# EAGLE board sensorboard final (EAGLE 9.3.0)
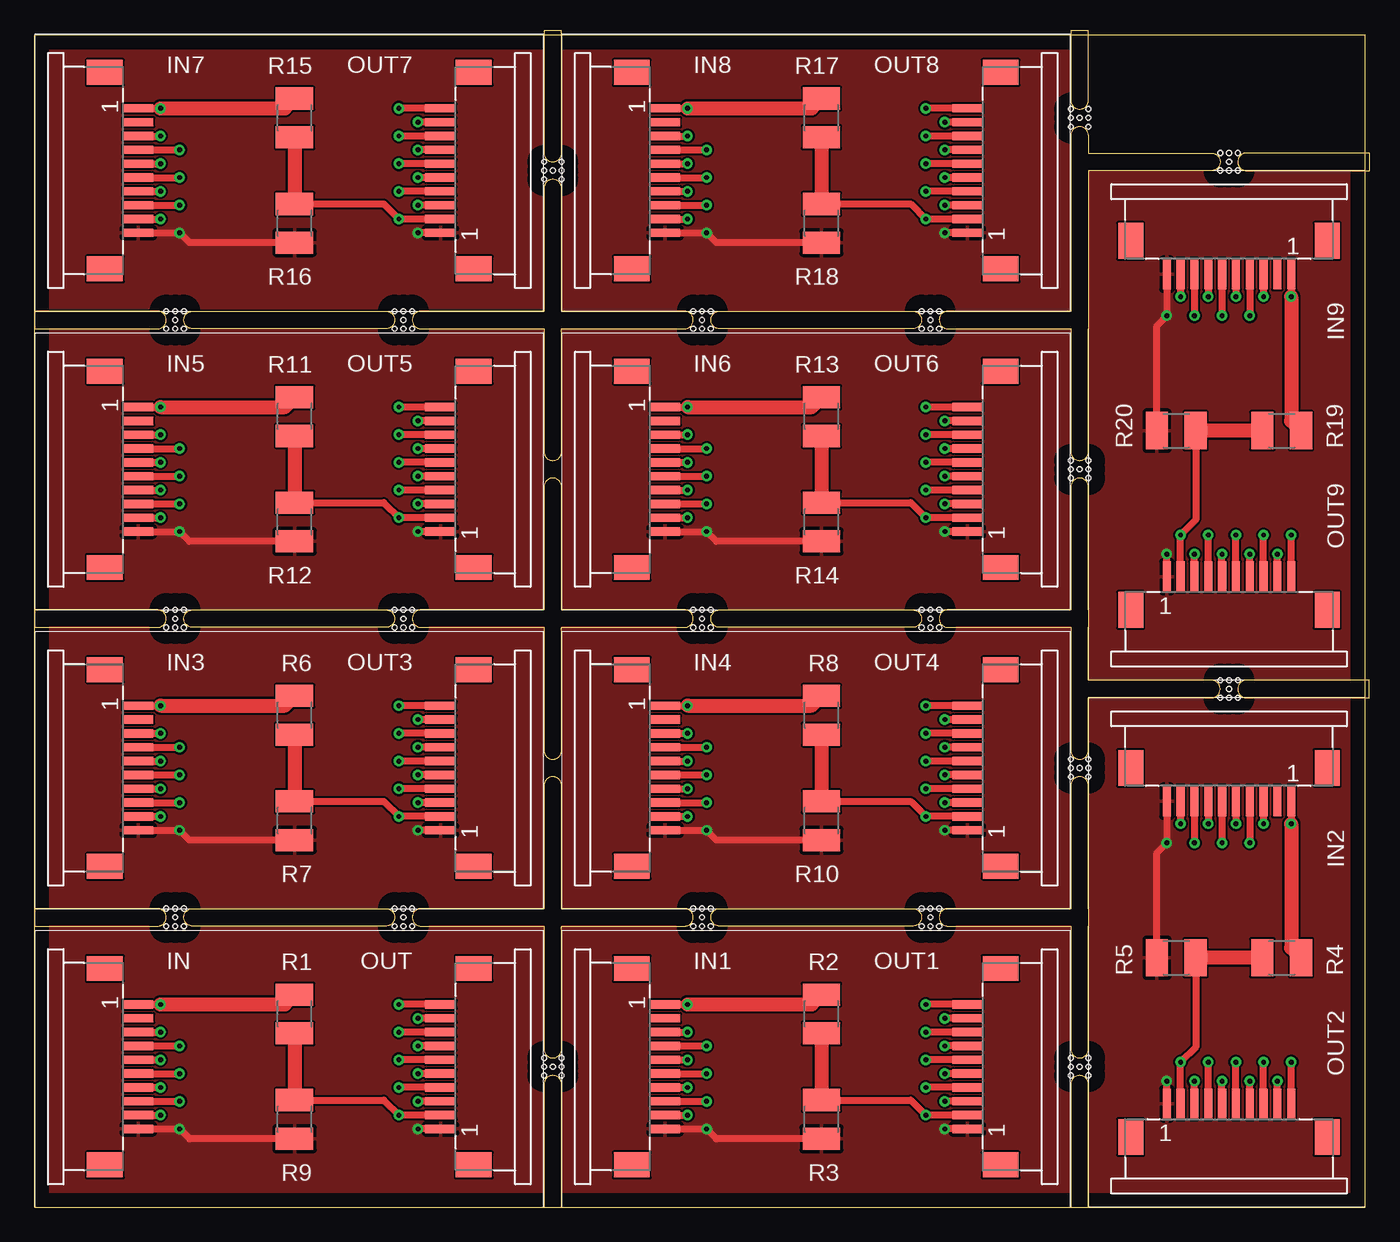
[diagram p0: board, top side]
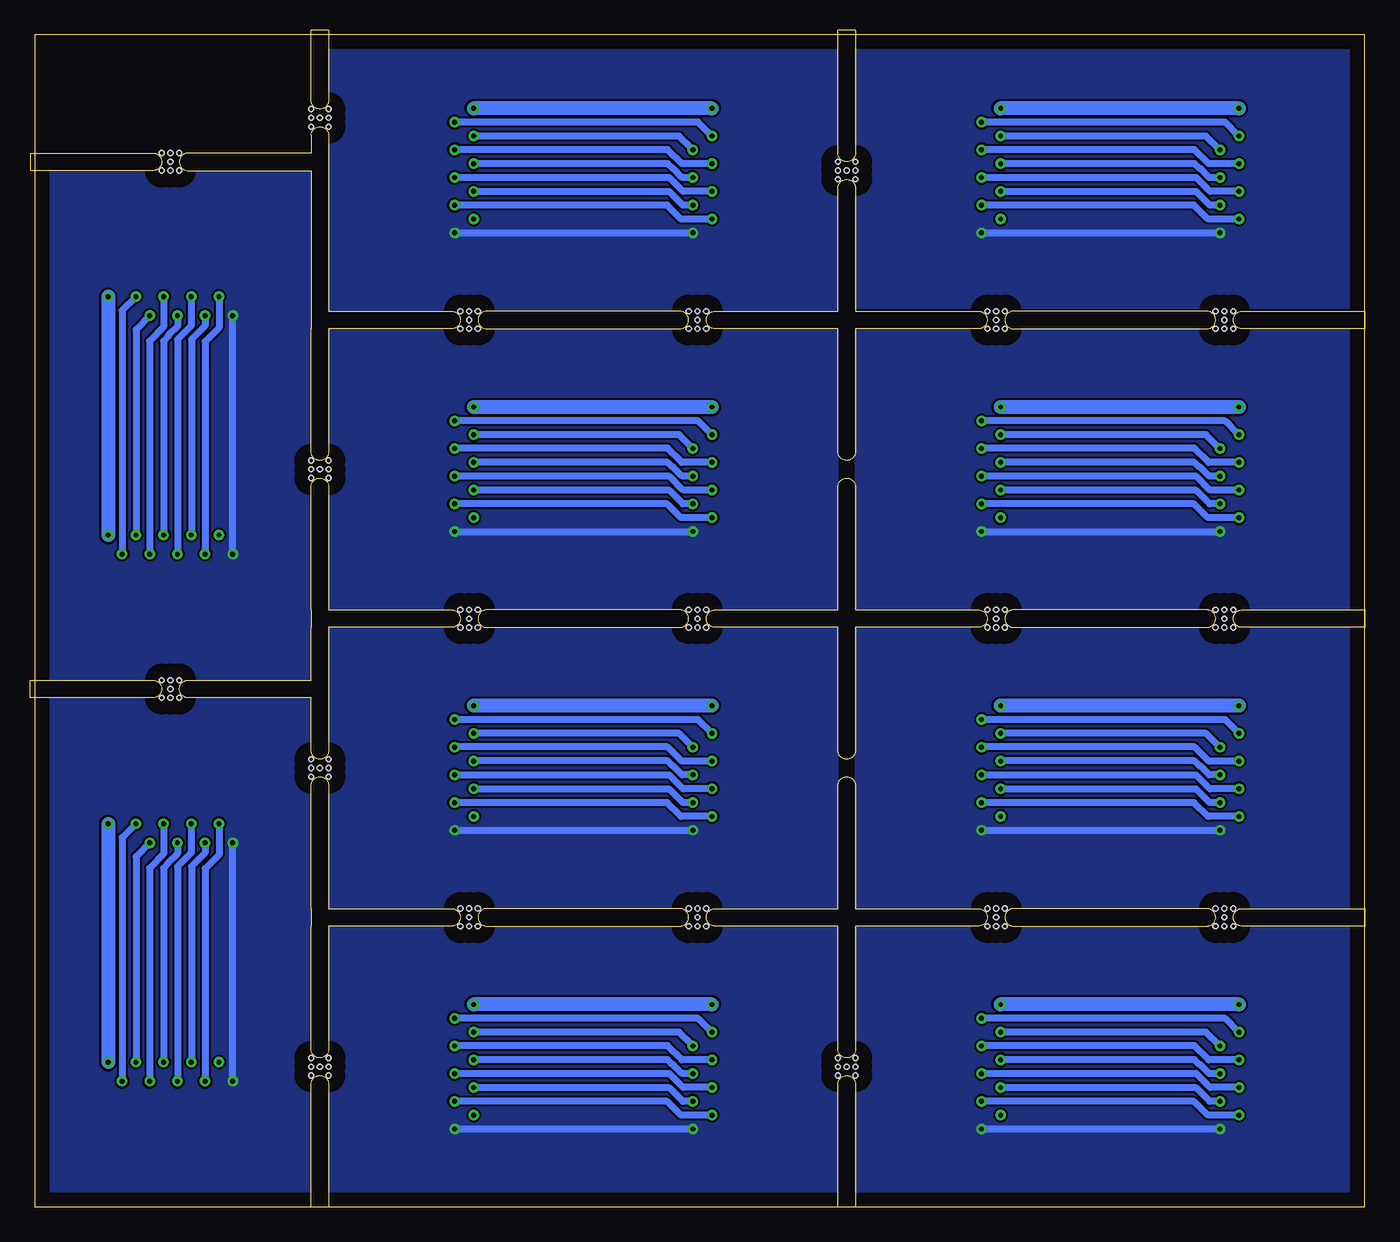
[diagram p1: board, bottom side, seen from below]

Size 96.19 x 84.76 mm. Coordinates in mm from the lower left corner, seen from the top.
Outline: 96.19,84.76 96.19,0 0,0 0,84.76 96.19,84.76
Copper layers (1*16): Top 0.035mm / dielectric 1.5mm / Bottom 0.035mm
Design rules "default": minimum track width 6mil, minimum drill 0.35mm, track to track 6mil, track to pad 6mil, pad to pad 6mil, via to via 6mil, smd to smd 6mil, copper to edge 40mil, drill to drill 6mil, minimum pad ring 10mil, minimum via ring 8mil, stop-mask expansion 4mil, vias tented up to drill 0mil, thermal gap 10mil
Holes 0.35 mm at 10.16,64.77 9.53,64.77 10.79,64.77 10.16,64.14 9.53,63.5 10.16,63.5 10.79,63.5 26.67,64.77 26.04,64.77 27.3,64.77 26.67,64.14 26.04,63.5 26.67,63.5 27.3,63.5 48.26,64.77 47.62,64.77 48.89,64.77 48.26,64.14 47.62,63.5 48.26,63.5 48.89,63.5 64.14,64.77 64.77,64.77 65.41,64.77 64.77,64.14 64.14,63.5 64.77,63.5 65.41,63.5 36.83,75.56 36.83,74.93 36.83,74.3 37.46,74.93 38.1,75.56 38.1,74.93 38.1,74.3 26.04,43.18 26.67,43.18 27.3,43.18 26.67,42.54 26.04,41.91 26.67,41.91 27.3,41.91 9.53,43.18 10.16,43.18 10.79,43.18 10.16,42.54 9.53,41.91 10.16,41.91 10.79,41.91 9.53,21.59 10.16,21.59 10.79,21.59 10.16,20.96 9.53,20.32 10.16,20.32 10.79,20.32 26.04,21.59 26.67,21.59 27.3,21.59 26.67,20.96 26.04,20.32 26.67,20.32 27.3,20.32 36.83,9.53 36.83,10.16 36.83,10.79 37.46,10.16 38.1,9.53 38.1,10.16 38.1,10.79 47.62,21.59 48.26,21.59 48.89,21.59 48.26,20.96 47.62,20.32 48.26,20.32 48.89,20.32 64.14,21.59 64.77,21.59 65.41,21.59 64.77,20.96 64.14,20.32 64.77,20.32 65.41,20.32 74.93,9.53 74.93,10.16 74.93,10.79 75.56,10.16 76.2,9.53 76.2,10.16 76.2,10.79 47.62,43.18 48.26,43.18 48.89,43.18 48.26,42.54 47.62,41.91 48.26,41.91 48.89,41.91 64.14,43.18 64.77,43.18 65.41,43.18 64.77,42.54 64.14,41.91 64.77,41.91 65.41,41.91 74.93,31.11 74.93,31.75 74.93,32.38 75.56,31.75 76.2,31.11 76.2,31.75 76.2,32.38 85.73,38.1 86.36,38.1 87,38.1 86.36,37.46 85.73,36.83 86.36,36.83 87,36.83 74.93,52.7 74.93,53.34 74.93,53.97 75.56,53.34 76.2,52.7 76.2,53.34 76.2,53.97 74.93,78.11 74.93,78.74 74.93,79.38 75.56,78.74 76.2,78.11 76.2,78.74 76.2,79.38 85.73,76.2 86.36,76.2 87,76.2 86.36,75.56 85.73,74.93 86.36,74.93 87,74.93
Milling: 134 lines

## Footprints (pad centres in the part's own frame; a part is rotated, then mirrored left to right if it is on the bottom)
68611014422 = smd 0.6 x 2.2: 1 -4.5,2.4; 2 -3.5,2.4; 3 -2.5,2.4; 4 -1.5,2.4; 5 -0.5,2.4; 6 0.5,2.4; 7 1.5,2.4; 8 2.5,2.4; 9 3.5,2.4; 10 4.5,2.4 | smd 1.8 x 2.6: Z1 -7.1,0; Z2 7.1,0
R1210 = smd 1.6 x 2.7: 1 -1.4,0; 2 1.4,0

## Placement (x,y rotation side)
IN  analog  [68611014422]  5.08,10.16 270 top
IN1  analog  [68611014422]  43.18,10.16 270 top
IN2  analog  [68611014422]  86.36,31.75 180 top
IN3  analog  [68611014422]  5.08,31.75 270 top
IN4  analog  [68611014422]  43.18,31.75 270 top
IN5  analog  [68611014422]  5.08,53.34 270 top
IN6  analog  [68611014422]  43.18,53.34 270 top
IN7  analog  [68611014422]  5.08,74.93 270 top
IN8  analog  [68611014422]  43.18,74.93 270 top
IN9  analog  [68611014422]  86.36,69.85 180 top
OUT  analog  [68611014422]  31.75,10.16 90 top
OUT1  analog  [68611014422]  69.85,10.16 90 top
OUT2  analog  [68611014422]  86.36,5.08 0 top
OUT3  analog  [68611014422]  31.75,31.75 90 top
OUT4  analog  [68611014422]  69.85,31.75 90 top
OUT5  analog  [68611014422]  31.75,53.34 90 top
OUT6  analog  [68611014422]  69.85,53.34 90 top
OUT7  analog  [68611014422]  31.75,74.93 90 top
OUT8  analog  [68611014422]  69.85,74.93 90 top
OUT9  analog  [68611014422]  86.36,43.18 0 top
R1  NTC  [R1210]  18.8,13.97 90 top
R2  NTC  [R1210]  56.9,13.97 90 top
R3  10K  [R1210]  56.9,6.35 90 top
R4  NTC  [R1210]  90.17,18.03 0 top
R5  10K  [R1210]  82.55,18.03 0 top
R6  NTC  [R1210]  18.8,35.56 90 top
R7  10K  [R1210]  18.8,27.94 90 top
R8  NTC  [R1210]  56.9,35.56 90 top
R9  10K  [R1210]  18.8,6.35 90 top
R10  10K  [R1210]  56.9,27.94 90 top
R11  NTC  [R1210]  18.8,57.15 90 top
R12  10K  [R1210]  18.8,49.53 90 top
R13  NTC  [R1210]  56.9,57.15 90 top
R14  10K  [R1210]  56.9,49.53 90 top
R15  NTC  [R1210]  18.8,78.74 90 top
R16  10K  [R1210]  18.8,71.12 90 top
R17  NTC  [R1210]  56.9,78.74 90 top
R18  10K  [R1210]  56.9,71.12 90 top
R19  NTC  [R1210]  90.17,56.13 0 top
R20  10K  [R1210]  82.55,56.13 0 top

## Library data of the parts
IN IN1-IN9 OUT OUT1-OUT9 = Wurth_Elektronik_Electromechanic_FPC_Connectors_&_Flat_Flexible_Cable_rev18c
R1-R20 = rcl; SPICEPREFIX: R

## Nets
+5V: IN.1 OUT.10 R1.2
+5V1: IN1.1 OUT1.10 R2.2
+5V2: IN2.1 OUT2.10 R4.2
+5V3: IN3.1 OUT3.10 R6.2
+5V4: IN4.1 OUT4.10 R8.2
+5V5: IN5.1 OUT5.10 R11.2
+5V6: IN6.1 OUT6.10 R13.2
+5V7: IN7.1 OUT7.10 R15.2
+5V8: IN8.1 OUT8.10 R17.2
+5V9: IN9.1 OUT9.10 R19.2
AD1: IN1.3 OUT1.9
AD2: IN.3 OUT.9
AD3: IN.4 OUT.8
AD4: IN.5 OUT.7
AD5: IN.6 OUT.6
AD6: IN.7 OUT.5
AD7: IN.8 OUT.4
AD8: IN.9 OUT.3
AD9: IN1.4 OUT1.8
AD10: IN1.5 OUT1.7
AD11: IN1.9 OUT1.3
AD12: IN1.8 OUT1.4
AD13: IN1.7 OUT1.5
AD14: IN1.6 OUT1.6
AD15: IN2.3 OUT2.9
AD16: IN2.4 OUT2.8
AD17: IN2.5 OUT2.7
AD18: IN2.9 OUT2.3
AD19: IN2.8 OUT2.4
AD20: IN2.7 OUT2.5
AD21: IN2.6 OUT2.6
AD22: IN3.3 OUT3.9
AD23: IN3.4 OUT3.8
AD24: IN3.5 OUT3.7
AD25: IN3.9 OUT3.3
AD26: IN3.8 OUT3.4
AD27: IN3.7 OUT3.5
AD28: IN3.6 OUT3.6
AD29: IN4.3 OUT4.9
AD30: IN4.4 OUT4.8
AD31: IN4.5 OUT4.7
AD32: IN4.9 OUT4.3
AD33: IN4.8 OUT4.4
AD34: IN4.7 OUT4.5
AD35: IN4.6 OUT4.6
AD36: IN5.3 OUT5.9
AD37: IN5.4 OUT5.8
AD38: IN5.5 OUT5.7
AD39: IN5.9 OUT5.3
AD40: IN5.8 OUT5.4
AD41: IN5.7 OUT5.5
AD42: IN5.6 OUT5.6
AD43: IN6.3 OUT6.9
AD44: IN6.4 OUT6.8
AD45: IN6.5 OUT6.7
AD46: IN6.9 OUT6.3
AD47: IN6.8 OUT6.4
AD48: IN6.7 OUT6.5
AD49: IN6.6 OUT6.6
AD50: IN7.3 OUT7.9
AD51: IN7.4 OUT7.8
AD52: IN7.5 OUT7.7
AD53: IN7.9 OUT7.3
AD54: IN7.8 OUT7.4
AD55: IN7.7 OUT7.5
AD56: IN7.6 OUT7.6
AD57: IN8.3 OUT8.9
AD58: IN8.4 OUT8.8
AD59: IN8.5 OUT8.7
AD60: IN8.9 OUT8.3
AD61: IN8.8 OUT8.4
AD62: IN8.7 OUT8.5
AD63: IN8.6 OUT8.6
AD64: IN9.3 OUT9.9
AD65: IN9.4 OUT9.8
AD66: IN9.5 OUT9.7
AD67: IN9.9 OUT9.3
AD68: IN9.8 OUT9.4
AD69: IN9.7 OUT9.5
AD70: IN9.6 OUT9.6
ADB: OUT.2 R1.1 R9.2
ADB1: OUT1.2 R2.1 R3.2
ADB2: OUT2.2 R4.1 R5.2
ADB3: OUT3.2 R6.1 R7.2
ADB4: OUT4.2 R8.1 R10.2
ADB5: OUT5.2 R11.1 R12.2
ADB6: OUT6.2 R13.1 R14.2
ADB7: OUT7.2 R15.1 R16.2
ADB8: OUT8.2 R17.1 R18.2
ADB9: OUT9.2 R19.1 R20.2
AGND: IN.10 OUT.1 R9.1
AGND1: IN1.10 OUT1.1 R3.1
AGND2: IN2.10 OUT2.1 R5.1
AGND3: IN3.10 OUT3.1 R7.1
AGND4: IN4.10 OUT4.1 R10.1
AGND5: IN5.10 OUT5.1 R12.1
AGND6: IN6.10 OUT6.1 R14.1
AGND7: IN7.10 OUT7.1 R16.1
AGND8: IN8.10 OUT8.1 R18.1
AGND9: IN9.10 OUT9.1 R20.1

## Tracks (layer width: path | path; a pad name or v marks a point on that pad's centre or on a via)
+5V  (via drill 0.35)
  Top 0.508: IN.1 v9.11,14.66 | OUT.10 v26.34,14.66
  Top 1.016: v9.11,14.66 18.09,14.66 R1.2
  Bottom 1.016: v9.11,14.66 v26.34,14.66
+5V1  (via drill 0.35)
  Top 0.508: IN1.1 v47.21,14.66 | OUT1.10 v64.44,14.66
  Top 1.016: v47.21,14.66 56.19,14.66 R2.2
  Bottom 1.016: v47.21,14.66 v64.44,14.66
+5V2  (via drill 0.35)
  Top 0.508: IN2.1 v90.86,27.72 | OUT2.10 v90.86,10.49
  Top 1.016: v90.86,27.72 90.86,18.74 R4.2
  Bottom 1.016: v90.86,27.72 v90.86,10.49
+5V3  (via drill 0.35)
  Top 0.508: IN3.1 v9.11,36.25 | OUT3.10 v26.34,36.25
  Top 1.016: v9.11,36.25 18.09,36.25 R6.2
  Bottom 1.016: v9.11,36.25 v26.34,36.25
+5V4  (via drill 0.35)
  Top 0.508: IN4.1 v47.21,36.25 | OUT4.10 v64.44,36.25
  Top 1.016: v47.21,36.25 56.19,36.25 R8.2
  Bottom 1.016: v47.21,36.25 v64.44,36.25
+5V5  (via drill 0.35)
  Top 0.508: IN5.1 v9.11,57.84 | OUT5.10 v26.34,57.84
  Top 1.016: v9.11,57.84 18.09,57.84 R11.2
  Bottom 1.016: v9.11,57.84 v26.34,57.84
+5V6  (via drill 0.35)
  Top 0.508: IN6.1 v47.21,57.84 | OUT6.10 v64.44,57.84
  Top 1.016: v47.21,57.84 56.19,57.84 R13.2
  Bottom 1.016: v47.21,57.84 v64.44,57.84
+5V7  (via drill 0.35)
  Top 0.508: IN7.1 v9.11,79.43 | OUT7.10 v26.34,79.43
  Top 1.016: v9.11,79.43 18.09,79.43 R15.2
  Bottom 1.016: v9.11,79.43 v26.34,79.43
+5V8  (via drill 0.35)
  Top 0.508: IN8.1 v47.21,79.43 | OUT8.10 v64.44,79.43
  Top 1.016: v47.21,79.43 56.19,79.43 R17.2
  Bottom 1.016: v47.21,79.43 v64.44,79.43
+5V9  (via drill 0.35)
  Top 0.508: IN9.1 v90.86,65.82 | OUT9.10 v90.86,48.59
  Top 1.016: v90.86,65.82 90.86,56.84 R19.2
  Bottom 1.016: v90.86,65.82 v90.86,48.59
AD1  (via drill 0.35)
  Top 0.508: IN1.3 v47.21,12.66 | OUT1.9 v65.82,13.66
  Bottom 0.508: v47.21,12.66 48.21,13.66 v65.82,13.66
AD2  (via drill 0.35)
  Top 0.508: IN.3 v9.11,12.66 | OUT.9 v27.72,13.66
  Bottom 0.508: v9.11,12.66 10.11,13.66 v27.72,13.66
AD3  (via drill 0.35)
  Top 0.508: IN.4 v10.49,11.66 | OUT.8 v26.34,12.66
  Bottom 0.508: v10.49,11.66 11.49,12.66 v26.34,12.66
AD4  (via drill 0.35)
  Top 0.508: IN.5 v9.11,10.66 | OUT.7 v27.72,11.66
  Bottom 0.508: v9.11,10.66 11.29,10.66 12.32,11.68 27.7,11.68 v27.72,11.66
AD5  (via drill 0.35)
  Top 0.508: IN.6 v10.49,9.66 | OUT.6 v26.34,10.66
  Bottom 0.508: v10.49,9.66 11.27,9.66 11.92,10.31 11.96,10.31 12.32,10.67 v26.33,10.67 v26.34,10.66
AD6  (via drill 0.35)
  Top 0.508: IN.7 v9.11,8.66 | OUT.5 v27.72,9.66
  Bottom 0.508: v9.11,8.66 11.2,8.66 12.19,9.65 v27.71,9.65 v27.72,9.66
AD7  (via drill 0.35)
  Top 0.508: IN.8 v10.49,7.66 | OUT.4 v26.34,8.66
  Bottom 0.508: v10.49,7.66 11.22,7.66 12.19,8.64 26.32,8.64 v26.34,8.66
AD8  (via drill 0.35)
  Top 0.508: IN.9 v9.11,6.66 | OUT.3 v27.72,7.66
  Bottom 0.508: v9.11,6.66 11.36,6.66 12.36,7.66 v27.72,7.66
AD9  (via drill 0.35)
  Top 0.508: IN1.4 v48.59,11.66 | OUT1.8 v64.44,12.66
  Bottom 0.508: v48.59,11.66 49.59,12.66 v64.44,12.66
AD10  (via drill 0.35)
  Top 0.508: IN1.5 v47.21,10.66 | OUT1.7 v65.82,11.66
  Bottom 0.508: v47.21,10.66 49.39,10.66 50.42,11.68 65.8,11.68 v65.82,11.66
AD11  (via drill 0.35)
  Top 0.508: IN1.9 v47.21,6.66 | OUT1.3 v65.82,7.66
  Bottom 0.508: v47.21,6.66 49.46,6.66 50.46,7.66 v65.82,7.66
AD12  (via drill 0.35)
  Top 0.508: IN1.8 v48.59,7.66 | OUT1.4 v64.44,8.66
  Bottom 0.508: v48.59,7.66 49.32,7.66 50.29,8.64 64.42,8.64 v64.44,8.66
AD13  (via drill 0.35)
  Top 0.508: IN1.7 v47.21,8.66 | OUT1.5 v65.82,9.66
  Bottom 0.508: v47.21,8.66 49.3,8.66 50.29,9.65 v65.81,9.65 v65.82,9.66
AD14  (via drill 0.35)
  Top 0.508: IN1.6 v48.59,9.66 | OUT1.6 v64.44,10.66
  Bottom 0.508: v48.59,9.66 49.37,9.66 50.02,10.31 50.06,10.31 50.42,10.67 v64.43,10.67 v64.44,10.66
AD15  (via drill 0.35)
  Top 0.508: IN2.3 v88.86,27.72 | OUT2.9 v89.86,9.11
  Bottom 0.508: v88.86,27.72 89.86,26.72 v89.86,9.11
AD16  (via drill 0.35)
  Top 0.508: IN2.4 v87.86,26.34 | OUT2.8 v88.86,10.49
  Bottom 0.508: v87.86,26.34 88.86,25.34 v88.86,10.49
AD17  (via drill 0.35)
  Top 0.508: IN2.5 v86.86,27.72 | OUT2.7 v87.86,9.11
  Bottom 0.508: v86.86,27.72 86.86,25.54 87.88,24.51 87.88,9.13 v87.86,9.11
AD18  (via drill 0.35)
  Top 0.508: IN2.9 v82.86,27.72 | OUT2.3 v83.86,9.11
  Bottom 0.508: v82.86,27.72 82.86,25.47 83.86,24.47 v83.86,9.11
AD19  (via drill 0.35)
  Top 0.508: IN2.8 v83.86,26.34 | OUT2.4 v84.86,10.49
  Bottom 0.508: v83.86,26.34 83.86,25.61 84.84,24.64 84.84,10.51 v84.86,10.49
AD20  (via drill 0.35)
  Top 0.508: IN2.7 v84.86,27.72 | OUT2.5 v85.86,9.11
  Bottom 0.508: v84.86,27.72 84.86,25.63 85.85,24.64 v85.85,9.12 v85.86,9.11
AD21  (via drill 0.35)
  Top 0.508: IN2.6 v85.86,26.34 | OUT2.6 v86.86,10.49
  Bottom 0.508: v85.86,26.34 85.86,25.56 86.51,24.91 86.51,24.87 86.87,24.51 v86.87,10.5 v86.86,10.49
AD22  (via drill 0.35)
  Top 0.508: IN3.3 v9.11,34.25 | OUT3.9 v27.72,35.25
  Bottom 0.508: v9.11,34.25 10.11,35.25 v27.72,35.25
AD23  (via drill 0.35)
  Top 0.508: IN3.4 v10.49,33.25 | OUT3.8 v26.34,34.25
  Bottom 0.508: v10.49,33.25 11.49,34.25 v26.34,34.25
AD24  (via drill 0.35)
  Top 0.508: IN3.5 v9.11,32.25 | OUT3.7 v27.72,33.25
  Bottom 0.508: v9.11,32.25 11.29,32.25 12.32,33.27 27.7,33.27 v27.72,33.25
AD25  (via drill 0.35)
  Top 0.508: IN3.9 v9.11,28.25 | OUT3.3 v27.72,29.25
  Bottom 0.508: v9.11,28.25 11.36,28.25 12.36,29.25 v27.72,29.25
AD26  (via drill 0.35)
  Top 0.508: IN3.8 v10.49,29.25 | OUT3.4 v26.34,30.25
  Bottom 0.508: v10.49,29.25 11.22,29.25 12.19,30.23 26.32,30.23 v26.34,30.25
AD27  (via drill 0.35)
  Top 0.508: IN3.7 v9.11,30.25 | OUT3.5 v27.72,31.25
  Bottom 0.508: v9.11,30.25 11.2,30.25 12.19,31.24 v27.71,31.24 v27.72,31.25
AD28  (via drill 0.35)
  Top 0.508: IN3.6 v10.49,31.25 | OUT3.6 v26.34,32.25
  Bottom 0.508: v10.49,31.25 11.27,31.25 11.92,31.9 11.96,31.9 12.32,32.26 v26.33,32.26 v26.34,32.25
AD29  (via drill 0.35)
  Top 0.508: IN4.3 v47.21,34.25 | OUT4.9 v65.82,35.25
  Bottom 0.508: v47.21,34.25 48.21,35.25 v65.82,35.25
AD30  (via drill 0.35)
  Top 0.508: IN4.4 v48.59,33.25 | OUT4.8 v64.44,34.25
  Bottom 0.508: v48.59,33.25 49.59,34.25 v64.44,34.25
AD31  (via drill 0.35)
  Top 0.508: IN4.5 v47.21,32.25 | OUT4.7 v65.82,33.25
  Bottom 0.508: v47.21,32.25 49.39,32.25 50.42,33.27 65.8,33.27 v65.82,33.25
AD32  (via drill 0.35)
  Top 0.508: IN4.9 v47.21,28.25 | OUT4.3 v65.82,29.25
  Bottom 0.508: v47.21,28.25 49.46,28.25 50.46,29.25 v65.82,29.25
AD33  (via drill 0.35)
  Top 0.508: IN4.8 v48.59,29.25 | OUT4.4 v64.44,30.25
  Bottom 0.508: v48.59,29.25 49.32,29.25 50.29,30.23 64.42,30.23 v64.44,30.25
AD34  (via drill 0.35)
  Top 0.508: IN4.7 v47.21,30.25 | OUT4.5 v65.82,31.25
  Bottom 0.508: v47.21,30.25 49.3,30.25 50.29,31.24 v65.81,31.24 v65.82,31.25
AD35  (via drill 0.35)
  Top 0.508: IN4.6 v48.59,31.25 | OUT4.6 v64.44,32.25
  Bottom 0.508: v48.59,31.25 49.37,31.25 50.02,31.9 50.06,31.9 50.42,32.26 v64.43,32.26 v64.44,32.25
AD36  (via drill 0.35)
  Top 0.508: IN5.3 v9.11,55.84 | OUT5.9 v27.72,56.84
  Bottom 0.508: v9.11,55.84 10.11,56.84 v27.72,56.84
AD37  (via drill 0.35)
  Top 0.508: IN5.4 v10.49,54.84 | OUT5.8 v26.34,55.84
  Bottom 0.508: v10.49,54.84 11.49,55.84 v26.34,55.84
AD38  (via drill 0.35)
  Top 0.508: IN5.5 v9.11,53.84 | OUT5.7 v27.72,54.84
  Bottom 0.508: v9.11,53.84 11.29,53.84 12.32,54.86 27.7,54.86 v27.72,54.84
AD39  (via drill 0.35)
  Top 0.508: IN5.9 v9.11,49.84 | OUT5.3 v27.72,50.84
  Bottom 0.508: v9.11,49.84 11.36,49.84 12.36,50.84 v27.72,50.84
AD40  (via drill 0.35)
  Top 0.508: IN5.8 v10.49,50.84 | OUT5.4 v26.34,51.84
  Bottom 0.508: v10.49,50.84 11.22,50.84 12.19,51.82 26.32,51.82 v26.34,51.84
AD41  (via drill 0.35)
  Top 0.508: IN5.7 v9.11,51.84 | OUT5.5 v27.72,52.84
  Bottom 0.508: v9.11,51.84 11.2,51.84 12.19,52.83 v27.71,52.83 v27.72,52.84
AD42  (via drill 0.35)
  Top 0.508: IN5.6 v10.49,52.84 | OUT5.6 v26.34,53.84
  Bottom 0.508: v10.49,52.84 11.27,52.84 11.92,53.49 11.96,53.49 12.32,53.85 v26.33,53.85 v26.34,53.84
AD43  (via drill 0.35)
  Top 0.508: IN6.3 v47.21,55.84 | OUT6.9 v65.82,56.84
  Bottom 0.508: v47.21,55.84 48.21,56.84 v65.82,56.84
AD44  (via drill 0.35)
  Top 0.508: IN6.4 v48.59,54.84 | OUT6.8 v64.44,55.84
  Bottom 0.508: v48.59,54.84 49.59,55.84 v64.44,55.84
AD45  (via drill 0.35)
  Top 0.508: IN6.5 v47.21,53.84 | OUT6.7 v65.82,54.84
  Bottom 0.508: v47.21,53.84 49.39,53.84 50.42,54.86 65.8,54.86 v65.82,54.84
AD46  (via drill 0.35)
  Top 0.508: IN6.9 v47.21,49.84 | OUT6.3 v65.82,50.84
  Bottom 0.508: v47.21,49.84 49.46,49.84 50.46,50.84 v65.82,50.84
AD47  (via drill 0.35)
  Top 0.508: IN6.8 v48.59,50.84 | OUT6.4 v64.44,51.84
  Bottom 0.508: v48.59,50.84 49.32,50.84 50.29,51.82 64.42,51.82 v64.44,51.84
AD48  (via drill 0.35)
  Top 0.508: IN6.7 v47.21,51.84 | OUT6.5 v65.82,52.84
  Bottom 0.508: v47.21,51.84 49.3,51.84 50.29,52.83 v65.81,52.83 v65.82,52.84
AD49  (via drill 0.35)
  Top 0.508: IN6.6 v48.59,52.84 | OUT6.6 v64.44,53.84
  Bottom 0.508: v48.59,52.84 49.37,52.84 50.02,53.49 50.06,53.49 50.42,53.85 v64.43,53.85 v64.44,53.84
AD50  (via drill 0.35)
  Top 0.508: IN7.3 v9.11,77.43 | OUT7.9 v27.72,78.43
  Bottom 0.508: v9.11,77.43 10.11,78.43 v27.72,78.43
AD51  (via drill 0.35)
  Top 0.508: IN7.4 v10.49,76.43 | OUT7.8 v26.34,77.43
  Bottom 0.508: v10.49,76.43 11.49,77.43 v26.34,77.43
AD52  (via drill 0.35)
  Top 0.508: IN7.5 v9.11,75.43 | OUT7.7 v27.72,76.43
  Bottom 0.508: v9.11,75.43 11.29,75.43 12.32,76.45 27.7,76.45 v27.72,76.43
AD53  (via drill 0.35)
  Top 0.508: IN7.9 v9.11,71.43 | OUT7.3 v27.72,72.43
  Bottom 0.508: v9.11,71.43 11.36,71.43 12.36,72.43 v27.72,72.43
AD54  (via drill 0.35)
  Top 0.508: IN7.8 v10.49,72.43 | OUT7.4 v26.34,73.43
  Bottom 0.508: v10.49,72.43 11.22,72.43 12.19,73.41 26.32,73.41 v26.34,73.43
AD55  (via drill 0.35)
  Top 0.508: IN7.7 v9.11,73.43 | OUT7.5 v27.72,74.43
  Bottom 0.508: v9.11,73.43 11.2,73.43 12.19,74.42 v27.71,74.42 v27.72,74.43
AD56  (via drill 0.35)
  Top 0.508: IN7.6 v10.49,74.43 | OUT7.6 v26.34,75.43
  Bottom 0.508: v10.49,74.43 11.27,74.43 11.92,75.08 11.96,75.08 12.32,75.44 v26.33,75.44 v26.34,75.43
AD57  (via drill 0.35)
  Top 0.508: IN8.3 v47.21,77.43 | OUT8.9 v65.82,78.43
  Bottom 0.508: v47.21,77.43 48.21,78.43 v65.82,78.43
AD58  (via drill 0.35)
  Top 0.508: IN8.4 v48.59,76.43 | OUT8.8 v64.44,77.43
  Bottom 0.508: v48.59,76.43 49.59,77.43 v64.44,77.43
AD59  (via drill 0.35)
  Top 0.508: IN8.5 v47.21,75.43 | OUT8.7 v65.82,76.43
  Bottom 0.508: v47.21,75.43 49.39,75.43 50.42,76.45 65.8,76.45 v65.82,76.43
AD60  (via drill 0.35)
  Top 0.508: IN8.9 v47.21,71.43 | OUT8.3 v65.82,72.43
  Bottom 0.508: v47.21,71.43 49.46,71.43 50.46,72.43 v65.82,72.43
AD61  (via drill 0.35)
  Top 0.508: IN8.8 v48.59,72.43 | OUT8.4 v64.44,73.43
  Bottom 0.508: v48.59,72.43 49.32,72.43 50.29,73.41 64.42,73.41 v64.44,73.43
AD62  (via drill 0.35)
  Top 0.508: IN8.7 v47.21,73.43 | OUT8.5 v65.82,74.43
  Bottom 0.508: v47.21,73.43 49.3,73.43 50.29,74.42 v65.81,74.42 v65.82,74.43
AD63  (via drill 0.35)
  Top 0.508: IN8.6 v48.59,74.43 | OUT8.6 v64.44,75.43
  Bottom 0.508: v48.59,74.43 49.37,74.43 50.02,75.08 50.06,75.08 50.42,75.44 v64.43,75.44 v64.44,75.43
AD64  (via drill 0.35)
  Top 0.508: IN9.3 v88.86,65.82 | OUT9.9 v89.86,47.21
  Bottom 0.508: v88.86,65.82 89.86,64.82 v89.86,47.21
AD65  (via drill 0.35)
  Top 0.508: IN9.4 v87.86,64.44 | OUT9.8 v88.86,48.59
  Bottom 0.508: v87.86,64.44 88.86,63.44 v88.86,48.59
AD66  (via drill 0.35)
  Top 0.508: IN9.5 v86.86,65.82 | OUT9.7 v87.86,47.21
  Bottom 0.508: v86.86,65.82 86.86,63.63 87.88,62.61 87.88,47.23 v87.86,47.21
AD67  (via drill 0.35)
  Top 0.508: IN9.9 v82.86,65.82 | OUT9.3 v83.86,47.21
  Bottom 0.508: v82.86,65.82 82.86,63.57 83.86,62.57 v83.86,47.21
AD68  (via drill 0.35)
  Top 0.508: IN9.8 v83.86,64.44 | OUT9.4 v84.86,48.59
  Bottom 0.508: v83.86,64.44 83.86,63.71 84.84,62.74 84.84,48.61 v84.86,48.59
AD69  (via drill 0.35)
  Top 0.508: IN9.7 v84.86,65.82 | OUT9.5 v85.86,47.21
  Bottom 0.508: v84.86,65.82 84.86,63.73 85.85,62.74 v85.85,47.22 v85.86,47.21
AD70  (via drill 0.35)
  Top 0.508: IN9.6 v85.86,64.44 | OUT9.6 v86.86,48.59
  Bottom 0.508: v85.86,64.44 85.86,63.66 86.51,63.01 86.51,62.97 86.87,62.61 v86.87,48.6 v86.86,48.59
ADB  (via drill 0.35)
  Top 0.508: OUT.2 v26.34,6.66 25.25,7.75 R9.2
  Top 1.016: R1.1 R9.2
ADB1  (via drill 0.35)
  Top 0.508: OUT1.2 v64.44,6.66 63.35,7.75 R3.2
  Top 1.016: R2.1 R3.2
ADB2  (via drill 0.35)
  Top 0.508: OUT2.2 v82.86,10.49 83.95,11.58 R5.2
  Top 1.016: R4.1 R5.2
ADB3  (via drill 0.35)
  Top 0.508: OUT3.2 v26.34,28.25 25.25,29.34 R7.2
  Top 1.016: R6.1 R7.2
ADB4  (via drill 0.35)
  Top 0.508: OUT4.2 v64.44,28.25 63.35,29.34 R10.2
  Top 1.016: R8.1 R10.2
ADB5  (via drill 0.35)
  Top 0.508: OUT5.2 v26.34,49.84 25.25,50.93 R12.2
  Top 1.016: R11.1 R12.2
ADB6  (via drill 0.35)
  Top 0.508: OUT6.2 v64.44,49.84 63.35,50.93 R14.2
  Top 1.016: R13.1 R14.2
ADB7  (via drill 0.35)
  Top 0.508: OUT7.2 v26.34,71.43 25.25,72.52 R16.2
  Top 1.016: R15.1 R16.2
ADB8  (via drill 0.35)
  Top 0.508: OUT8.2 v64.44,71.43 63.35,72.52 R18.2
  Top 1.016: R17.1 R18.2
ADB9  (via drill 0.35)
  Top 0.508: OUT9.2 v82.86,48.59 83.95,49.68 R20.2
  Top 1.016: R19.1 R20.2
AGND  (via drill 0.35)
  Top 0.508: IN.10 v10.49,5.66 11.2,4.95 R9.1 | OUT.1 v27.72,5.66
  Bottom 0.508: v27.72,5.66 v10.49,5.66
  pour Top: 0,20.32 0,0 36.83,0 36.83,20.32
  pour Bottom: 0,20.32 0,0 36.83,0 36.83,20.32
AGND1  (via drill 0.35)
  Top 0.508: IN1.10 v48.59,5.66 49.3,4.95 R3.1 | OUT1.1 v65.82,5.66
  Bottom 0.508: v65.82,5.66 v48.59,5.66
  pour Top: 38.1,20.32 38.1,0 74.93,0 74.93,20.32
  pour Bottom: 38.1,20.32 38.1,0 74.93,0 74.93,20.32
AGND2  (via drill 0.35)
  Top 0.508: IN2.10 v81.86,26.34 81.15,25.63 R5.1 | OUT2.1 v81.86,9.11
  Bottom 0.508: v81.86,9.11 v81.86,26.34
  pour Top: 96.52,36.83 76.2,36.83 76.2,0 96.52,0
  pour Bottom: 96.52,36.83 76.2,36.83 76.2,0 96.52,0
AGND3  (via drill 0.35)
  Top 0.508: IN3.10 v10.49,27.25 11.2,26.54 R7.1 | OUT3.1 v27.72,27.25
  Bottom 0.508: v27.72,27.25 v10.49,27.25
  pour Top: 0,41.91 0,21.59 36.83,21.59 36.83,41.91
  pour Bottom: 0,41.91 0,21.59 36.83,21.59 36.83,41.91
AGND4  (via drill 0.35)
  Top 0.508: IN4.10 v48.59,27.25 49.3,26.54 R10.1 | OUT4.1 v65.82,27.25
  Bottom 0.508: v65.82,27.25 v48.59,27.25
  pour Top: 38.1,41.91 38.1,21.59 74.93,21.59 74.93,41.91
  pour Bottom: 38.1,41.91 38.1,21.59 74.93,21.59 74.93,41.91
AGND5  (via drill 0.35)
  Top 0.508: IN5.10 v10.49,48.84 11.2,48.13 R12.1 | OUT5.1 v27.72,48.84
  Bottom 0.508: v27.72,48.84 v10.49,48.84
  pour Top: 0,63.5 0,43.18 36.83,43.18 36.83,63.5
  pour Bottom: 0,63.52 0,43.18 36.83,43.18 36.83,63.52
AGND6  (via drill 0.35)
  Top 0.508: IN6.10 v48.59,48.84 49.3,48.13 R14.1 | OUT6.1 v65.82,48.84
  Bottom 0.508: v65.82,48.84 v48.59,48.84
  pour Top: 38.1,63.5 38.1,43.18 74.93,43.18 74.93,63.5
  pour Bottom: 38.1,63.5 38.1,43.18 74.93,43.18 74.93,63.5
AGND7  (via drill 0.35)
  Top 0.508: IN7.10 v10.49,70.43 11.2,69.72 R16.1 | OUT7.1 v27.72,70.43
  Bottom 0.508: v27.72,70.43 v10.49,70.43
  pour Top: 0,85.09 0,64.93 36.83,64.93 36.83,85.09
  pour Bottom: 0,85.09 0,64.94 36.83,64.94 36.83,85.09
AGND8  (via drill 0.35)
  Top 0.508: IN8.10 v48.59,70.43 49.3,69.72 R18.1 | OUT8.1 v65.82,70.43
  Bottom 0.508: v65.82,70.43 v48.59,70.43
  pour Top: 38.1,85.09 38.1,64.77 74.93,64.77 74.93,85.09
  pour Bottom: 38.1,85.09 38.1,64.77 74.93,64.77 74.93,85.09
AGND9  (via drill 0.35)
  Top 0.508: IN9.10 v81.86,64.44 81.15,63.73 R20.1 | OUT9.1 v81.86,47.21
  Bottom 0.508: v81.86,47.21 v81.86,64.44
  pour Top: 96.52,74.93 76.2,74.93 76.2,38.1 96.52,38.1
  pour Bottom: 96.52,74.93 76.2,74.93 76.2,38.1 96.52,38.1